# EAGLE board atmega16-128.bak (EAGLE 9.0.1)
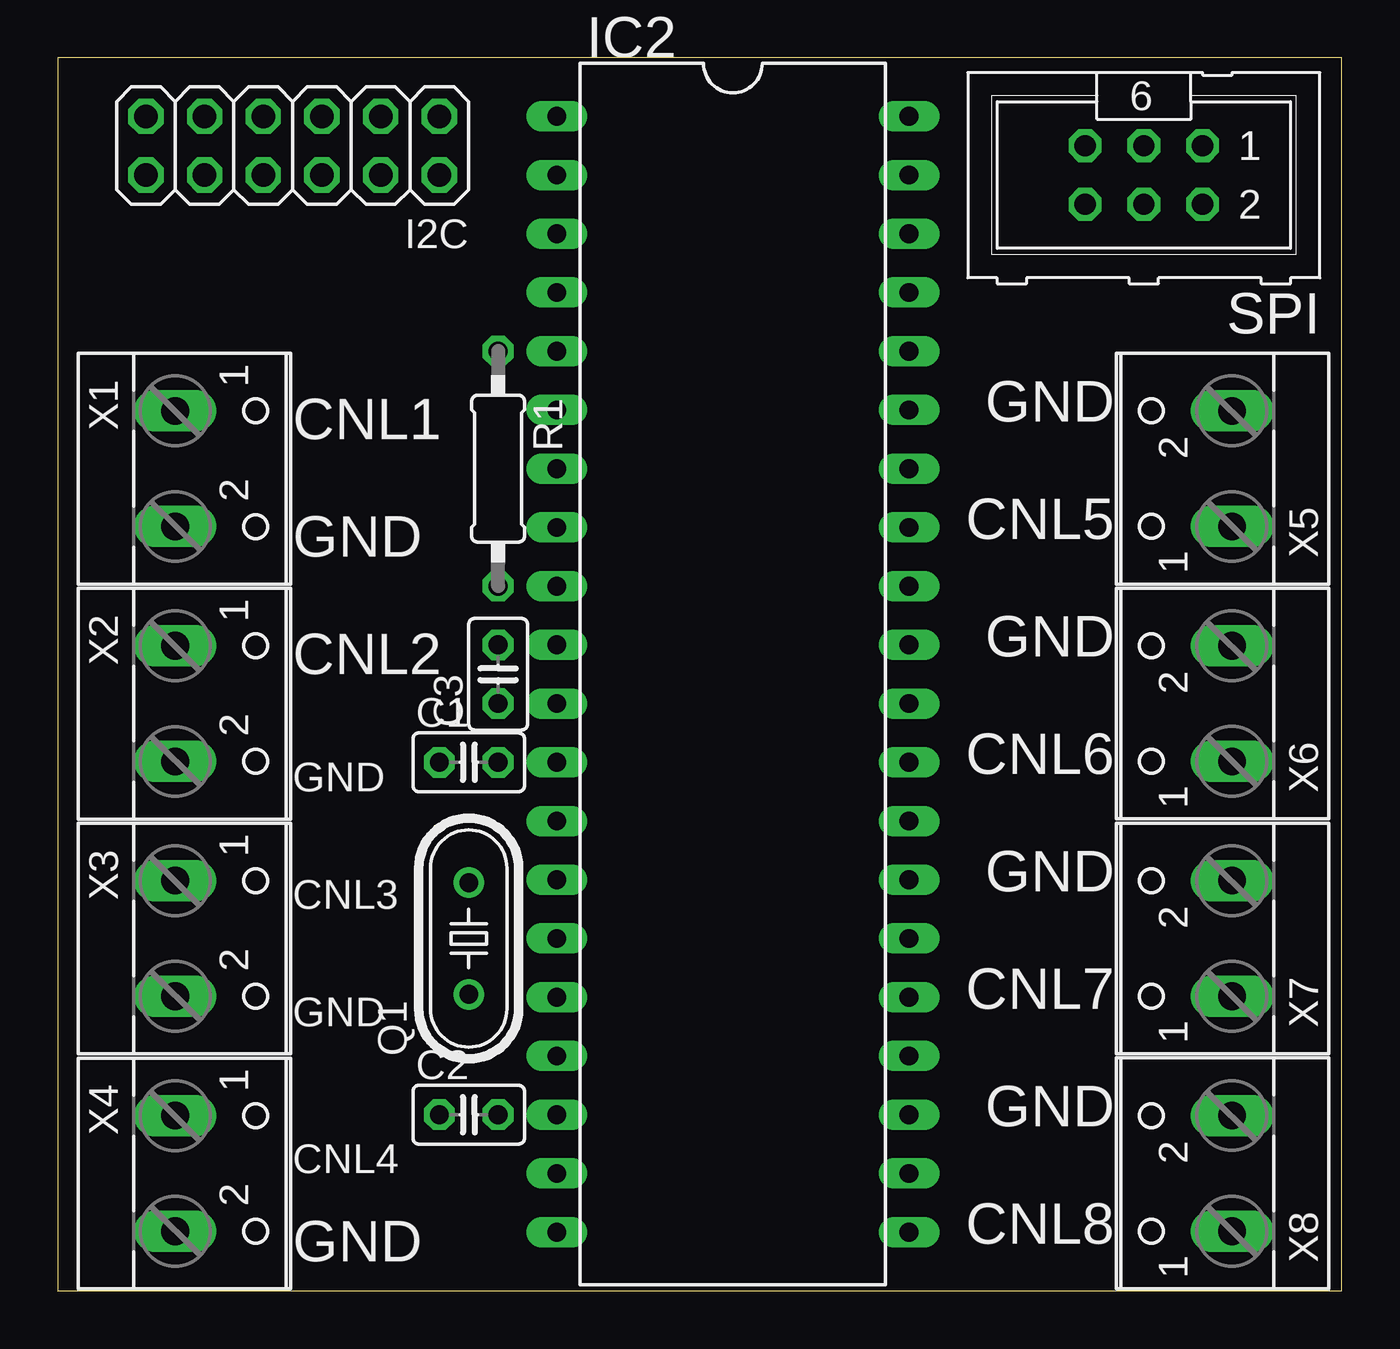
[diagram p0: board, top side]
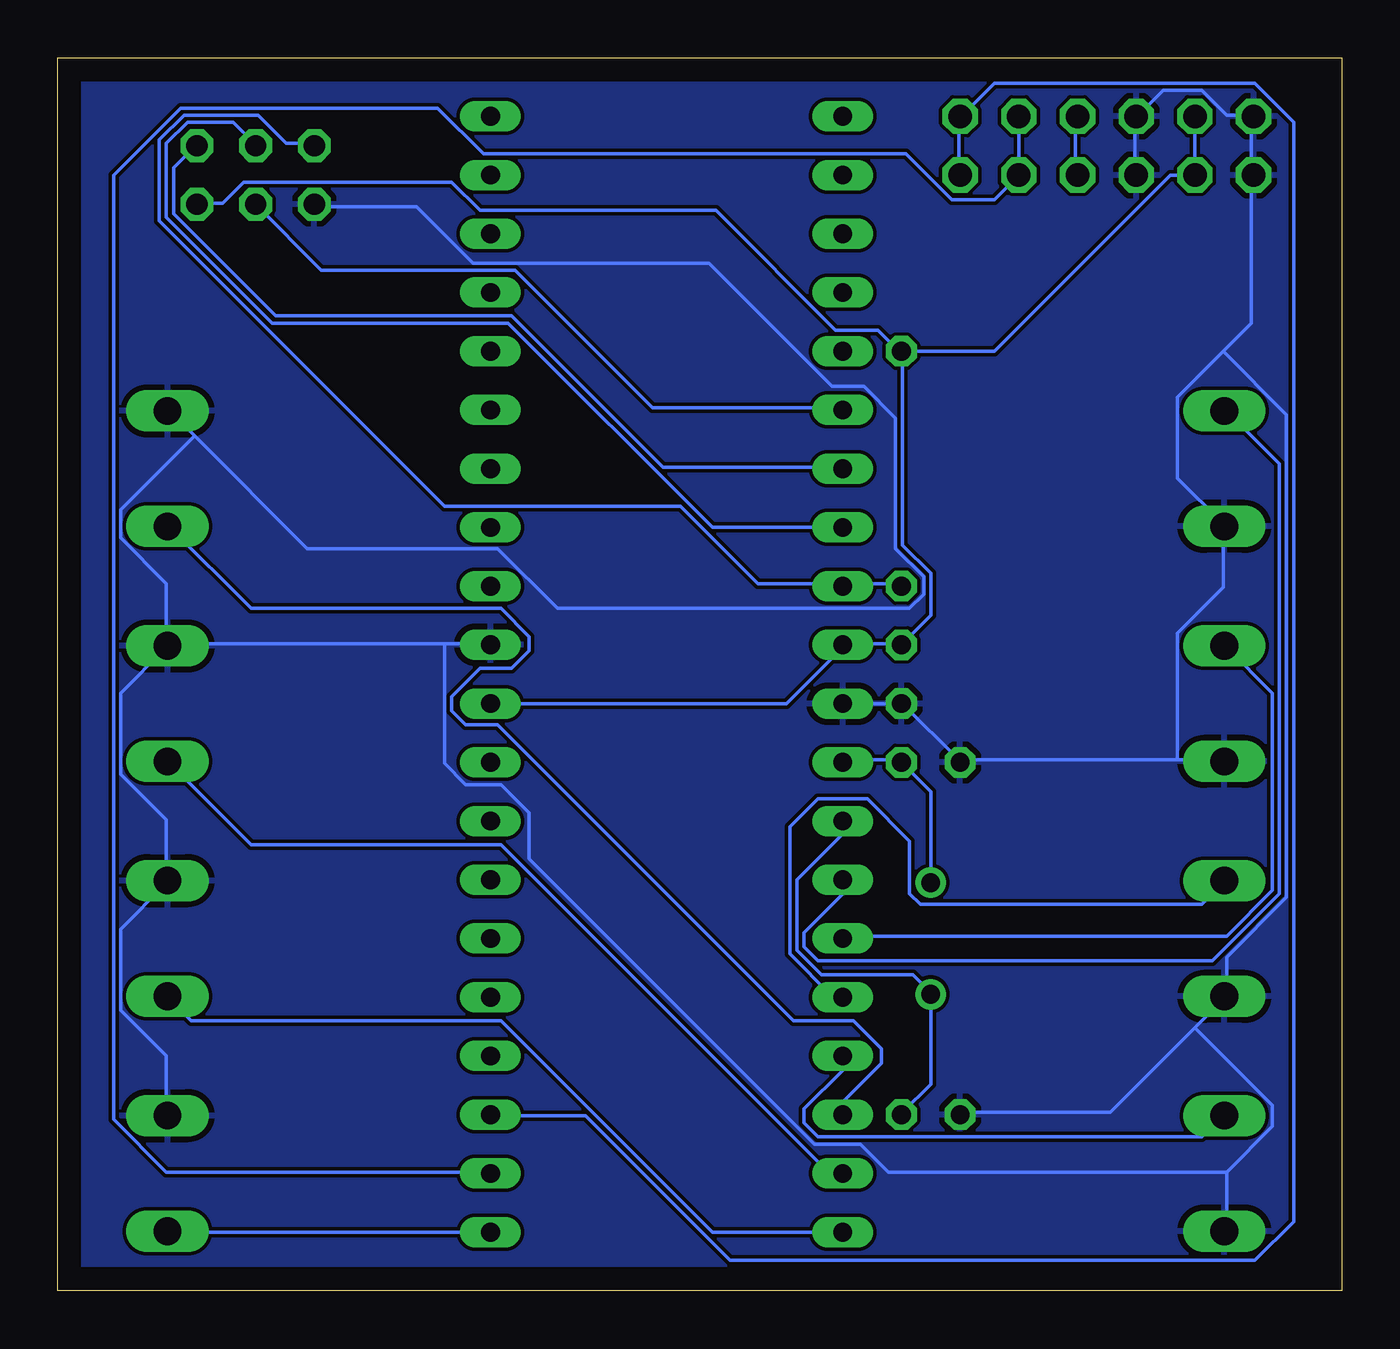
[diagram p1: board, bottom side, seen from below]

Size 55.55 x 53.33 mm. Coordinates in mm from the lower left corner, seen from the top.
Outline: 0,0 55.55,0 55.55,53.33 0,53.33 0,0
Copper layers (1*16): Top 0.035mm / dielectric 1.5mm / Bottom 0.035mm
Design rules "default": minimum track width 6mil, minimum drill 0.35mm, track to track 6mil, track to pad 6mil, pad to pad 6mil, via to via 6mil, smd to smd 6mil, copper to edge 40mil, drill to drill 6mil, minimum pad ring 10mil, minimum via ring 8mil, stop-mask expansion 4mil, vias tented up to drill 0mil, thermal gap 10mil

## Footprints (pad centres in the part's own frame; a part is rotated, then mirrored left to right if it is on the bottom)
C025-025X050 = drill 0.813 octagon: 1 -1.27,0; 2 1.27,0
2X06 = drill 1.016 octagon: 1 -6.35,-1.27; 2 -6.35,1.27; 3 -3.81,-1.27; 4 -3.81,1.27; 5 -1.27,-1.27; 6 -1.27,1.27; 7 1.27,-1.27; 8 1.27,1.27; 9 3.81,-1.27; 10 3.81,1.27; 11 6.35,-1.27; 12 6.35,1.27
DIL40 = drill 0.813 long: 1 -24.13,-7.62; 2 -21.59,-7.62; 3 -19.05,-7.62; 4 -16.51,-7.62; 5 -13.97,-7.62; 6 -11.43,-7.62; 7 -8.89,-7.62; 8 -6.35,-7.62; 9 -3.81,-7.62; 10 -1.27,-7.62; 11 1.27,-7.62; 12 3.81,-7.62; 13 6.35,-7.62; 14 8.89,-7.62; 15 11.43,-7.62; 16 13.97,-7.62; 17 16.51,-7.62; 18 19.05,-7.62; 19 21.59,-7.62; 20 24.13,-7.62; 21 24.13,7.62; 22 21.59,7.62; 23 19.05,7.62; 24 16.51,7.62; 25 13.97,7.62; 26 11.43,7.62; 27 8.89,7.62; 28 6.35,7.62; 29 3.81,7.62; 30 1.27,7.62; 31 -1.27,7.62; 32 -3.81,7.62; 33 -6.35,7.62; 34 -8.89,7.62; 35 -11.43,7.62; 36 -13.97,7.62; 37 -16.51,7.62; 38 -19.05,7.62; 39 -21.59,7.62; 40 -24.13,7.62
HC49/S = drill 0.813: 1 -2.413,0; 2 2.413,0
0207/10 = drill 0.813 octagon: 1 -5.08,0; 2 5.08,0
ML6 = drill 0.914 octagon: 1 -2.54,-1.27; 2 -2.54,1.27; 3 0,-1.27; 4 0,1.27; 5 2.54,-1.27; 6 2.54,1.27
W237-102 = drill 1.194 long: 1 -2.5,-1.27; 2 2.5,-1.27

## Placement (x,y rotation side)
C1  22p  [C025-025X050]  17.78,22.86 0 top
C2  22p  [C025-025X050]  17.78,7.62 0 top
C3  100n  [C025-025X050]  19.05,26.67 90 top
I2C  [2X06]  10.16,49.53 180 top
IC2  MEGA32-P  [DIL40]  29.21,26.67 270 top
Q1  12m  [HC49/S]  17.78,15.24 90 top
R1  10k  [0207/10]  19.05,35.56 270 top
SPI  [ML6]  46.99,48.26 180 top
X1  [W237-102]  6.35,35.56 270 top
X2  [W237-102]  6.35,25.4 270 top
X3  [W237-102]  6.35,15.24 270 top
X4  [W237-102]  6.35,5.08 270 top
X5  [W237-102]  49.53,35.56 90 top
X6  [W237-102]  49.53,25.4 90 top
X7  [W237-102]  49.53,15.24 90 top
X8  [W237-102]  49.53,5.08 90 top

## Library data of the parts
C1-C3 = rcl
I2C = pinhead
IC2 = atmel; MPN: ATMEGA32-16PU; OC_FARNELL: 1661729; OC_NEWARK: 51P1794
Q1 = crystal; OC_FARNELL: 1667008; OC_NEWARK: unknown
R1 = resistor
SPI = con-ml; OC_FARNELL: unknown; OC_NEWARK: unknown
X1-X8 = con-wago-500; MPN: 237-102; OC_FARNELL: unknown; OC_NEWARK: 70K9898

## Nets
+3V3: C3.2 I2C.9 I2C.10 IC2.10 IC2.30 R1.1 SPI.2
+5V: I2C.5 I2C.6
CHANNEL1: IC2.14 X1.1
CHANNEL2: IC2.15 X2.1
CHANNEL3: IC2.16 X3.1
CHANNEL4: IC2.17 X4.1
CHANNEL5: IC2.18 X5.1
CHANNEL6: IC2.19 X6.1
CHANNEL7: IC2.20 X7.1
CHANNEL8: IC2.21 X8.1
GND: C1.1 C2.1 C3.1 I2C.7 I2C.8 I2C.11 I2C.12 IC2.11 IC2.31 SPI.6 X1.2 X2.2 X3.2 X4.2 X5.2 X6.2 X7.2 X8.2
IO14: IC2.6 SPI.4
N$1: C2.2 IC2.13 Q1.1
N$2: C1.2 IC2.12 Q1.2
N$3: I2C.1 I2C.2 IC2.23
N$4: IC2.8 SPI.3
N$5: I2C.3 I2C.4 IC2.22
N$6: IC2.7 SPI.1
RESET: IC2.9 R1.2 SPI.5

## Tracks (layer width: path | path; a pad name or v marks a point on that pad's centre or on a via)
+3V3
  Bottom 0.152: I2C.9 I2C.10 7.42,48.26 15.04,40.64 19,40.64 | IC2.30 24.03,25.4 21.59,27.84 IC2.10 21.59,27.99 19.15,27.99 C3.2 17.78,29.21 17.78,31.04 19,32.26 19,40.64 | SPI.2 49.48,47.04 48.41,47.04 47.5,47.95 38.51,47.95 37.29,46.74 27.08,46.74 21.9,41.55 20.07,41.55 19.15,40.64 R1.1 19,40.64
+5V
  Bottom 0.152: I2C.6 11.53,48.26 11.53,50.7 I2C.5
CHANNEL1
  Bottom 0.152: IC2.14 21.59,17.17 23.27,15.49 23.27,14.88 22.66,14.28 5.59,14.28 2.69,17.17 2.69,35.76 4.98,38.05 X1.1
CHANNEL2
  Bottom 0.152: IC2.15 21.59,15.34 4.98,15.34 3,17.32 3,25.86 4.98,27.84 X2.1
CHANNEL3
  Bottom 0.152: IC2.16 21.59,12.75 22.05,12.75 23.88,14.58 23.88,20.07 22.66,21.29 20.52,21.29 18.69,19.46 18.69,17.17 18.24,16.71 6.04,16.71 5.13,17.63 X3.1
CHANNEL4
  Bottom 0.152: IC2.17 21.59,9.55 23.27,7.87 23.27,7.26 22.66,6.66 6.04,6.66 5.13,7.57 X4.1
CHANNEL5
  Bottom 0.152: IC2.18 21.59,8.18 19.91,9.86 19.91,10.46 21.13,11.68 23.72,11.68 36.52,24.49 37.9,24.49 38.51,25.1 38.51,25.71 37.29,26.92 35.92,26.92 35.15,27.69 35.15,28.3 36.37,29.52 47.19,29.52 50.7,33.02 X5.1
CHANNEL6
  Bottom 0.152: IC2.19 21.59,5.13 22.2,5.13 36.37,19.3 47.19,19.3 50.7,22.81 X6.1
CHANNEL7
  Bottom 0.152: IC2.20 27.23,2.54 36.37,11.68 49.78,11.68 50.7,12.6 X7.1
CHANNEL8
  Bottom 0.152: IC2.21 50.7,2.54 X8.1
GND
  Bottom 0.152: 6.35,11.38 5.13,12.6 X3.2 4.98,12.75 4.98,14.43 2.39,17.02 2.39,37.9 5.13,40.64 | 6.35,11.38 10.01,7.72 16.41,7.72 C2.1 | 4.98,5.13 4.98,2.69 X4.2 | 4.98,5.13 3,7.11 3,8.03 6.35,11.38 | 3.91,48.26 3.91,50.7 I2C.11 3.91,50.85 4.98,50.85 6.04,51.92 7.72,51.92 8.79,50.85 I2C.7 8.94,50.7 8.94,48.26 I2C.8 | IC2.11 C3.1 19,25.4 16.56,22.96 C1.1 16.41,22.96 7.11,22.96 | 7.11,22.96 5.13,22.96 X2.2 | 7.11,22.96 7.11,28.45 5.13,30.43 5.13,33.02 X1.2 5.13,33.17 7.11,35.15 7.11,38.66 5.13,40.64 | 3.91,48.26 3.91,41.86 5.13,40.64 | 3.91,48.26 I2C.12 | X8.2 50.85,7.72 50.85,10.16 52.83,12.14 52.83,15.65 50.85,17.63 X7.2 50.85,17.78 50.85,20.37 52.83,22.35 52.83,25.86 50.85,27.84 X6.2 | 38.81,27.99 50.7,27.99 X6.2 | 38.81,27.99 36.83,27.99 IC2.31 | 49.63,36.98 50.7,38.05 X5.2 | 49.63,36.98 44.76,32.11 36.52,32.11 33.93,29.52 18.69,29.52 18.09,30.12 18.09,30.89 19.3,32.11 19.3,37.74 20.68,39.12 22.05,39.12 27.38,44.45 37.59,44.45 40.03,46.89 44.45,46.89 SPI.6 | 49.63,36.98 52.83,33.78 52.83,32.56 50.85,30.58 50.85,27.99 X6.2 | 4.98,5.13 19.61,5.13 20.83,6.35 22.81,6.35 35.15,18.69 35.15,20.68 36.37,21.89 37.9,21.89 38.81,22.81 38.81,27.99
  pour Bottom: 0,53.34 55.88,53.34 55.88,0 0,0
IO14
  Bottom 0.152: SPI.4 44.15,44.15 35.76,44.15 29.82,38.2 21.59,38.2 IC2.6
N$1
  Bottom 0.152: C2.2 19,7.72 17.78,8.94 Q1.1 17.78,12.9 18.54,13.67 22.5,13.67 23.57,14.73 23.57,17.78 21.59,19.76 IC2.13
N$2
  Bottom 0.152: Q1.2 17.78,21.59 C1.2 19.15,22.96 21.59,22.96 IC2.12
N$3
  Bottom 0.152: IC2.23 36.83,7.57 32.71,7.57 26.47,1.32 3.76,1.32 2.08,3 2.08,50.55 3.76,52.22 15.04,52.22 16.41,50.85 I2C.1 16.56,50.7 16.56,48.26 I2C.2
N$4
  Bottom 0.152: IC2.8 27.23,33.02 36.07,41.86 46.28,41.86 50.85,46.43 50.85,49.63 49.94,50.55 47.96,50.55 47.04,49.63 SPI.3
N$5
  Bottom 0.152: IC2.22 36.83,5.13 50.85,5.13 53.14,7.42 53.14,48.26 50.24,51.16 39.12,51.16 37.13,49.17 18.85,49.17 16.87,47.19 15.04,47.19 I2C.4 I2C.3
N$6
  Bottom 0.152: IC2.7 21.59,35.61 29.36,35.61 35.92,42.16 46.13,42.16 50.55,46.58 50.55,48.56 49.63,49.48 SPI.1
RESET
  Bottom 0.152: 21.59,30.58 19.15,30.58 R1.2 | 21.59,30.58 25.25,30.58 28.6,33.93 38.81,33.93 51.16,46.28 51.16,49.78 50.09,50.85 46.89,50.85 45.67,49.63 44.45,49.63 SPI.5 | 21.59,30.58 IC2.9

## Text on the board
tNames: GND | CNL1 | CNL5 | GND | GND | CNL2 | CNL6 | GND | GND | CNL3 | CNL7 | GND | GND | CNL4 | CNL8 | GND